# Altium PCB ESP32 WITH USB C PCB V111.PcbDoc (part 3 of 3)
Units mil, origin at the board's own origin, x right, y up, seen from the top; angles counter-clockwise.
Board outline 2735 x 1100 mil, 4 copper layers (L1, L2, L3, L4), stack 54.293 mil thick; 64 components, 73 nets, 299 pads, 176 vias.
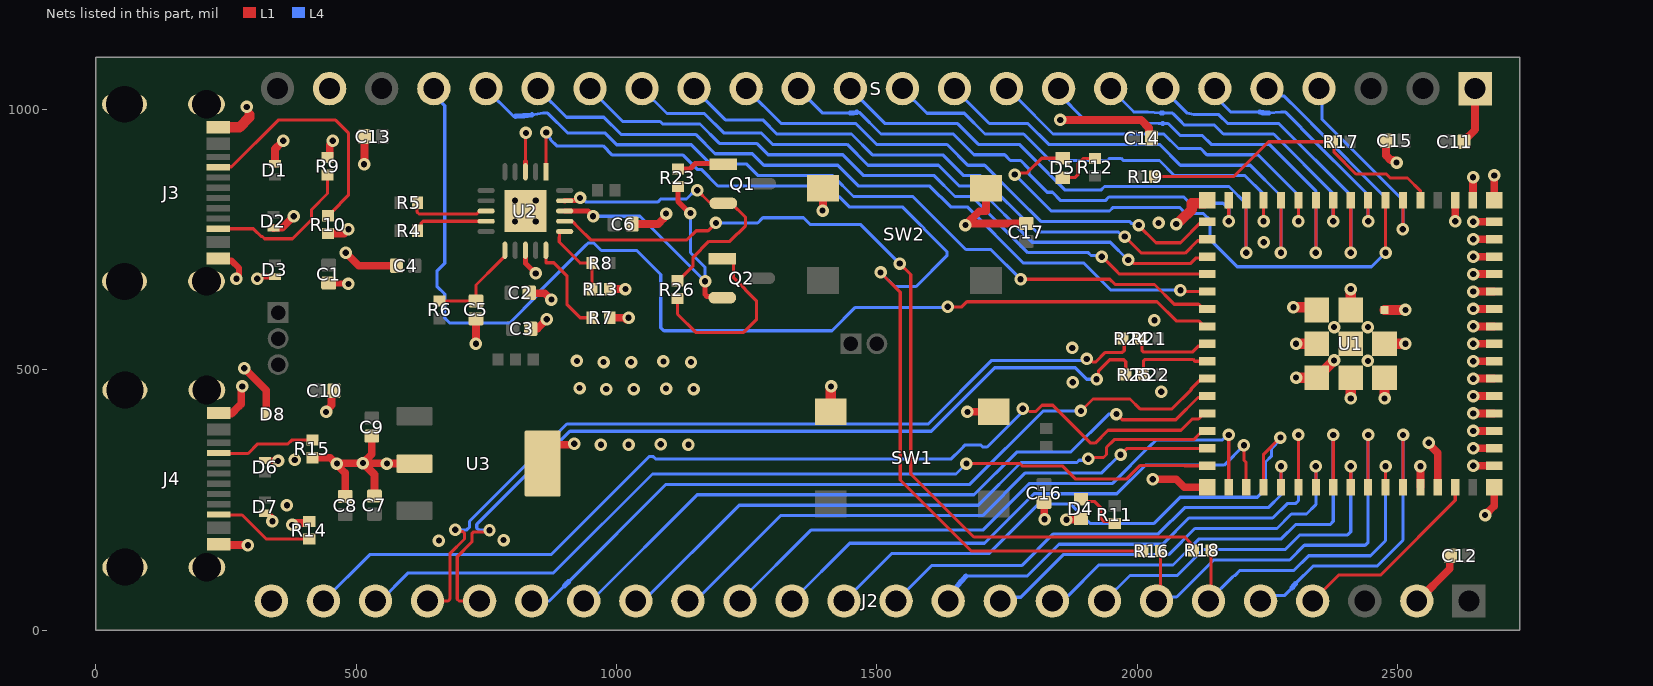
[diagram p4: the nets of this part, all layers, seen from the top]

## Via types
v1: diameter 24, hole 12, L1 to L4, tented both sides, 176 vias

## Nets (pads, with @x,y where several pads share a name; then routed paths per layer and width w, separated by ;. In a path a pad name is that pad's centre, name@x,y a point inside that pad or via, vN(x,y) a via of type N, cw(c..) or ccw(c..) an arc to the next point about the centre after c; other vN are vias at no path point) (continued)
CON_ESP_USB_N: J2.21 R24.1 | length 1669
  L1 w6.03: J2.21@637,56 676.45,56 679.99,59.53 679.99,146.99 708.06,175.06 708.06,186.03 704.53,189.56 693.44,189.56 v1(690,193) ; v1(1903,521) 1907.86,521 1913.8,515.06 1920.51,515.06 1938.84,533.39 1971.47,533.39 1975,536.93 R24.1@1975,563
  L4 w6.03: v1(690,193) 690.5,192.5 712.45,192.5 717.49,197.53 717.49,208.87 904.6,395.99 1598.6,395.99 1720.64,518.03 1900.03,518.03 v1(1903,521)
CON_ESP_USB_P: J2.20 R25.1 | length 1680.7
  L1 w6.03: J2.20@737,56 697.55,56 694.01,59.53 694.01,141.17 722.09,169.25 722.09,185.2 725.62,188.73 752.73,188.73 v1(756,192) ; v1(1922,482) 1925.44,485.44 1925.44,497.44 1947.36,519.36 1974.47,519.36 1978,515.83 R25.1@1978,491
  L4 w6.03: v1(756,192) 755.5,192.5 735.05,192.5 731.51,196.03 731.51,203.06 910.41,381.95 1604.41,381.95 1726.45,504 1881,504 1903,482 v1(1922,482)
DTR_FTDI: Q2.2 R23.2 U2.18 | length 589.1
  L1 w10.01: U2.18@900.41,805 945,805 v1(955,795) ; R23.2@1118,852.07 1118,823 v1@1140,801 ; v1(1170,670) 1170,645 1174.01,640.99 1200.76,640.99 Q2.2@1203.15,638.6
  L4 w6: v1(955,795) 1045,795 v1(1170,670) 1169.99,697.01 1142,725 v1(1142,801)
ESP_USB_N: R21.2 R24.2 U1.23 | length 159.1
  L1 w6.03: R21.2@2008.86,563 2008.86,537.53 2012.39,534 2106,534 2117.14,545.14 2129.59,545.14 U1.23@2134.45,550
ESP_USB_P: R22.2 R25.2 U1.24 | length 150.9
  L1 w6.03: R25.2@2011.86,491 2011.86,516.44 2015.39,519.97 2107.27,519.97 2110.71,516.54 U1.24@2134.45,516.54
FTDI_RESET: C5.2 R6.2 U2.11 | length 178.8
  L1 w6: R6.2@660,631.93 660.2,632.13 729.8,632.13 C5.2@730,632.32 730,655 730,663 772.63,705.63 U2.11@785.12,718.12
FTDI_USB_N: R4.1 U2.9 | length 144
  L1 w6.03: R4.1@618,767 624.62,773.62 624.62,781.78 628.16,785.32 725,785.32 U2.9@749.59,785.32
FTDI_USB_P: R5.1 U2.8 | length 154.9
  L1 w6.03: R5.1@618,821 617,820 617,802.88 620.53,799.34 725,799.34 731.67,799.34 737.32,805 U2.8@749.59,805
GND: C1.1 C2.1 C3.1 C4.1 C5.1 C6.1 C7.1 C8.1 C9.1 C10.1 C11.1 C12.1 C13.1 C14.1 C15.1 C16.1 C17.1 D1.1 D2.1 D3.2 D4.1 D6.1 D7.1 D8.2 J2.2 J2.24 J3.A1B12 J3.B1A12 J3.S1 J3.S2 J3.S3 J3.S4 J4.A1B12 J4.B1A12 J4.S1 J4.S2 J4.S3 J4.S4 R7.2 R9.1 R10.1 R13.1 R14.1 R15.1 S.1 S.23 SW1.3 SW1.4 SW2.3 SW2.4 U1.1 U1.2 U1.42 U1.43 U1.46 U1.47 U1.48 U1.49 U1.50 U1.51 U1.52 U1.53 U1.54 U1.55 U1.56 U1.57 U1.58 U1.59 U1.60 U1.61 U1.62 U1.63 U1.64 U1.65 U1.66 U1.67 U1.68 U1.69 U1.70 U1.71 U1.72 U1.73 U2.3 U2.13 U2.21 U3.2 U3.4 | length 4119.8
  L1 w6: 825,900 825,954 v1(826,955)
  L1 w10.01: U2.13@825,729.59 825.23,729.35 825.23,714.77 825.23,704.77 v1(845,685) ; U2.3@825,880.41 825,900
  L1 w12: J3.B1A12@235.12,713.94 239.06,710 260,710 275,695 v1@275,675 ; v1@315,675 319.2,679.2 D3.2@344,679.2 ; D7.1@325.3,224.7 329.63,224.7 336.7,217.63 336.7,211.3 v1(339,209) ; D6.1@325.3,325.3 349.7,325.3 v1(350,325) ; C1.1@447,666.68 447.84,665.84 484.16,665.84 v1(485,665)
  L1 w15: J4.B1A12@249.84,164.02 250.35,163.51 291.49,163.51 v1(292,163) ; J4.A1B12@249.84,415.98 260.67,415.98 274.68,430 279.28,434.59 279.28,466.28 v1(281,468) ; v1(285,503) 327.2,460.8 D8.2@327.2,415 ; D2.1@341,772.2 341.61,772.81 357.81,772.81 v1@375,790 ; D1.1@344,895.8 344,924 v1@355,935 ; v1(377,202) 379.44,202 383.16,205.73 406.87,205.73 R14.1@410,208.86 ; R15.1@418.18,331.07 450.06,331.07 461.13,320 v1(463,320) ; v1(442,419) 442,421.44 452.78,432.21 452.78,455.45 C10.1@457.32,460 ; R9.1@445,907.93 446.18,907.93 449.31,911.06 449.31,931.88 455,937.56 v1(455,940) ; R10.1@446,762.07 477.07,762.07 v1(485,770) ; C8.1@479,256.65 479,301.56 463,317.56 v1(463,320) ; v1(480,725) 505,700 545,700 C4.1@577.68,700 ; v1@515.68,895 C13.1@515.68,948 ; C9.1@530,372.68 530,338 v1(513,321) ; C7.1@535,257.32 535,299 v1(513,321) ; U3.2@611.97,320 v1(559,320) 558.5,320.5 513.5,320.5 v1(513,321) ; v1(730,550) C5.1@730,597.68 ; C2.1@832.32,648 836.39,648 837.42,646.97 862.06,646.97 874.02,635 v1(875,635) ; C3.1@835.32,579 848,579 v1(866,597) v1@866,594.56 ; U3.4@858.03,320 858.03,329.05 884.98,356 v1@915,356 ; R7.2@986.93,600 1015,600 v1@1019,596 ; R13.1@986.93,655 v1@1017.56,655 ; C6.1@1030,780 1080,780 v1@1090,790 ; v1@1395,805 1396.5,806.5 SW2.4@1396.5,848.58 ; v1@1678,419.58 SW1.3@1724.5,419.58 ; SW2.3@1709.5,848.58 1709.5,804.5 1696.5,804.5 1672.94,780.94 1674.16,779.72 1675.62,781.18 C17.1@1786.86,781.18 ; C16.1@1821,245.35 1821.5,244.85 1821.5,213.5 v1(1822,213) ; v1(1852,980) 2007.35,980 2022.78,964.58 2022.78,949.55 C14.1@2027.32,945 C14.1@2029.64,942.68 ; v1(1864,212) 1890,212 D4.1@1892,214 ; v1(2030,290) 2075,290 2090.59,274.41 U1.64@2134.45,274.41 U1.64@2133.74,273.7 ; C15.1@2477.68,940 2477.68,911.79 2486.46,903 v1@2491,903 ; J2.2@2538.34,56 2600.14,117.79 2600.14,141.46 C12.1@2601.68,143 ; U1.42@2543.9,274.41 v1(2543.9,314.57) ; v1(2560,360) 2560,357.56 2577.36,340.2 2577.36,314.57 U1.43@2577.36,274.41 ; v1(2610.83,785.43) U1.2@2610.83,825.59 ; C11.1@2627.32,938 2627.32,939.57 2649,961.25 S.1@2649,1040 ; U1.1@2644.29,825.59 2644.65,825.94 2644.65,869.65 v1(2645,870) ; v1(2645.47,315.75) U1.46@2685.63,315.75 ; v1(2645.47,349.21) U1.47@2685.63,349.21 ; v1(2645.47,382.68) U1.48@2685.63,382.68 ; v1(2645.47,416.14) U1.49@2685.63,416.14 ; v1(2645.47,449.61) U1.50@2685.63,449.61 ; v1(2645.47,483.07) U1.51@2685.63,483.07 ; v1(2645.47,516.54) U1.52@2685.63,516.54 ; v1(2645.47,550) U1.53@2685.63,550 ; v1(2645.47,583.46) U1.54@2685.63,583.46 ; v1(2645.47,616.93) U1.55@2685.63,616.93 ; v1(2645.47,650.39) U1.56@2685.63,650.39 ; v1(2645.47,683.86) U1.57@2685.63,683.86 ; v1(2645.47,717.32) U1.58@2685.63,717.32 ; v1(2645.47,750.79) U1.59@2685.63,750.79 ; v1(2645.47,784.25) U1.60@2685.63,784.25 ; v1(2668,221) 2685.63,238.63 U1.65@2685.63,274.41 ; U1.62@2685.63,825.59 v1@2685.63,873.21 ; v1(463,320) 463.5,320.5 512.5,320.5 v1(513,321)
  L1 w20: J3.A1B12@235.12,965.91 275.91,965.91 295,985 295,990 ; SW1.4@1411.5,419.58 1411.5,464.5 v1@1412,465 ; v1@2083.93,786.93 2104.84,807.84 2104.84,819.84 2128.7,819.84 U1.63@2134.45,825.59 ; v1(2300,620) 2340.04,620 U1.71@2345.08,614.96 ; v1(2305.04,485.04) U1.73@2345.08,485.04 v1(2378,518) ; v1(2305.04,550) U1.72@2345.08,550 ; v1(2410.04,445) U1.70@2410.04,485.04 ; U1.69@2410.04,614.96 v1(2410.04,655) ; v1(2475,445) U1.68@2475,485.04 ; U1.67@2475,550 v1(2515.04,550) ; U1.66@2475,614.96 v1(2515.04,614.96)
  other v1: 659,172 783,173 367,240 382,327 970,356 1023,356 1138,356 1085,357 919,358 1674,419 2046,458 980,463 1033,463 1148,463 1095,464 929,465 1412,468 1876,476 975,515 1028,515 1143,515 1090,516 924,517 2443,517 1875,542 2378,582 2443,582 2033,595 1023,600 1017,655 270,675 310,675 2243,745 1670,778 2075,780 2041,782 805,785 845,785 380,795 1095,800 1395.75,805.75 805,825 845,825 2685.81,873.39 515,895 2498,898 360,940 290,1005
GPIO0: R17.1 R19.1 U1.4 | length 606.2
  L1 w6: R19.1@2032.93,871 2185,871 2252,938 R17.1@2375.07,938 2378.2,934.87 2378.2,917.8 2420,876 2478.28,876 2485.78,868.5 2519.04,868.5 2544.27,843.27 2544.27,825.96 U1.4@2543.9,825.59
GPIO1: S.4 U1.5 | length 392.8
  L1 w6: v1(2510,770) 2510.43,770.43 U1.5@2510.43,825.59
  L4 w6: S.4@2349,1040 2355.23,1033.77 2355.23,980.63 2510.43,825.43 2510.43,770.43 v1(2510,770)
GPIO2: D5.1 S.5 U1.6 | length 1450.4
  L1 w6: v1(1765,875) 1767.68,877.68 1787.68,877.68 1790,880 1816.4,906.4 D5.1@1857,906.4 ; v1@2476.97,725.04 U1.6@2476.97,825.59
  L4 w6: v1(1765,875) 1835,805 1946.82,805 1953.82,812 2081.18,812 2093.18,800 2127.43,800 2140,787.43 2140,750 2192,698 2449.93,698 v1(2476.93,725) 2476.93,830.65 2335.23,972.35 2335.23,973.05 2295.28,1013 2294.58,1013 2281.52,1026.06 2277.56,1026.06 2263.61,1040 S.5@2249,1040
GPIO3: S.6 U1.7 | length 479.1
  L1 w6: v1@2443.07,785 v1(2443.5,785.43) U1.7@2443.5,825.59
  L4 w6: S.6@2149,1040 2149,1026 2177.07,997.93 2180,995 2235.44,995 ; 2252.62,993.14 2276.72,995 2285,995 2287.93,992.07 2315.23,964.77 2315.23,964.06 2443.5,835.79 v1(2443.5,785.43)
  L4 w10: 2235.44,995 ccw(c2249,1040) 2252.62,993.14
GPIO4: S.7 U1.8 | length 655.6
  L1 w6: v1(2410,725) v1(2410,725) U1.8@2410.04,825.59
  L4 w6: S.7@2049,1040 2094.02,994.98 2095.95,993.05 2107.79,990 2156.72,990 2173.72,973 2177.86,973 2272,973 2410,835 v1(2410,725)
GPIO5: S.8 U1.9 | length 603.5
  L1 w6: v1(2376.57,785.43) U1.9@2376.57,825.59
  L4 w6: S.8@1949,1040 1991.07,997.93 1994,995 2020.63,995 2045.48,993.13 ; 2049.24,993 2059.38,993.05 2067.66,993.05 2069.13,991.59 2080.72,980 2090.72,970 2148.43,970 2165.43,953 2262,953 2376.57,838.43 v1(2376.57,785.43)
  L4 w10: 2045.48,993.13 ccw(c2049,1040) 2049.24,993
GPIO6: S.9 U1.10 | length 798.5
  L1 w6: v1(2343.07,725) U1.10@2343.11,825.59
  L4 w6: S.9@1849,1040 1849,1030 1898.18,980.82 1900.96,978.04 1904.89,977.9 2040.78,973.02 2040.96,973 2048.72,973 ; 2049.28,973 2059.43,973 2062.36,970.07 2082.43,950 2125,950 2142,933 2253.72,933 2343.07,843.64 v1(2343.07,725)
  L4 w10: 2048.72,973 ccw(c2049,1040) 2049.28,973
GPIO7: S.10 U1.11 | length 740.6
  L1 w6: v1(2309.65,785.43) U1.11@2309.65,825.59
  L4 w6: S.10@1749,1040 1751.83,1027 1756.84,1022 1769.32,1022 1838.32,953 2051.15,953 2079.15,925 2121.72,925 2133.72,913 2232,913 2309.65,835.35 v1(2309.65,785.43)
GPIO8: S.11 U1.12 | length 921.9
  L1 w6: v1@2276.18,725.04 U1.12@2276.18,825.59
  L4 w6: S.11@1649,1040 1716,973 1790.04,973 1830.04,933 1969.72,933 2042.86,933 2082.86,893 2217,893 2276.14,833.86 v1(2276.14,725)
GPIO9: S.12 U1.13 | length 873
  L1 w6: v1(2242.72,785.43) U1.13@2242.72,825.59
  L4 w6: S.12@1549,1040 1596.14,992.86 1667.86,992.86 1707.72,953 1781.75,953 1832.75,902 1942.82,902 1946.82,906 1969.18,906 1973.18,902 2042.72,902 2071.72,873 2207,873 2242.72,837.28 v1(2242.72,785.43)
GPIO10: S.13 U1.14 | length 1052.2
  L1 w6: v1@2209.25,725.04 U1.14@2209.25,825.59
  L4 w6: S.13@1449,1040 1516.14,972.86 1655,972.86 1694.86,933 1773.47,933 1861.47,845 1930.25,845 1937.25,852 2176.35,852 2209.21,819.14 v1(2209.21,725)
GPIO11: S.14 U1.15 | length 998.6
  L1 w6: v1(2175.79,785.43) U1.15@2175.79,825.59
  L4 w6: S.14@1349,1040 1396,993 1449,993 ; 1460.84,994.52 1462.06,994.52 1466.2,994.52 1507.86,952.86 1646.72,952.86 1649.64,949.93 1686.57,913 1745.28,913 1756.28,902 1776.18,902 1792,886.18 1792,876.28 1827.28,841 1837.18,841 1853.18,825 1938.53,825 1945.53,832 2089.47,832 2101.47,820 2164.93,820 2175.79,809.14 v1(2175.79,785.43)
  L4 w10: 1449,993 ccw(c1449,1040) 1460.84,994.52
GPIO12: S.15 U1.16 | length 1025.4
  L1 w6: v1(2003,778) 2003,777 2036,744 2083,744 2103.7,764.7 2103.7,764.87 2112.49,773.66 2112.66,773.66 2120.38,781.38 2131.57,781.38 U1.16@2134.45,784.25
  L4 w6: S.15@1249,1040 1316,973 1459.43,973 1462.36,970.07 1499.57,932.86 1635,932.86 1637.93,929.93 1674.86,893 1706.85,893 1767.85,832 1767.96,832 1814.96,785 1985.18,785 1989.5,780.68 2000.32,780.68 v1(2003,778)
GPIO13: S.16 U1.17 | length 1127.4
  L1 w6: v1(1976,756) 1976.18,756 2008.18,724 2092,724 2115.91,747.91 2131.57,747.91 U1.17@2134.45,750.79
  L4 w6: S.16@1149,1040 1209,980 1280.72,980 1307.72,953 1451.15,953 1491.29,912.86 1626.72,912.86 1666.57,873 1698.57,873 1806.57,765 1963.21,765 1972.21,756 v1(1976,756)
GPIO14: S.17 U1.18 | length 1230.3
  L1 w6: v1(1983,711) 1986.79,711 1993.93,703.86 2101.86,703.86 2112.47,714.47 2131.59,714.47 U1.18@2134.45,717.32
  L4 w6: S.17@1049,1040 1096.77,992.23 1168.49,992.23 1205.72,955 1277.43,955 1299.43,933 1442.86,933 1483,892.86 1618.43,892.86 1658.29,853 1690.28,853 1798.28,745 1948.28,745 1982.28,711 v1(1983,711)
GPIO15: S.18 U1.19 | length 1333
  L1 w6: v1(1932,717) 1933,717 1957.89,692.11 ; 1957.79,692 1965.93,683.86 1981.14,683.86 1989,683.86 U1.19@2134.45,683.86
  L4 w6: S.18@949,1040 1012,977 1083.72,977 1088.49,972.23 1160.21,972.23 1197.43,935 1269.15,935 1291.15,913 1434.58,913 1474.72,872.86 1610.15,872.86 1650,833 1682,833 1790,725 1906.03,725 1911.35,719.68 1929.32,719.68 v1(1932,717)
GPIO16: S.19 U1.20 | length 1445.7
  L1 w6: v1@2083,650.39 U1.20@2134.45,650.39
  L4 w6: S.19@849,1040 904,985 975.72,985 1008.49,952.23 1151.92,952.23 1189.15,915 1260.86,915 1282.86,893 1425,893 1465.14,852.86 1601.86,852.86 1641.72,813 1673.72,813 1781.72,705 1897.75,705 1949.75,653 v1(2083,653)
GPIO17: S.20 U1.21 | length 1563.8
  L1 w6: v1(1776,674) 1947.5,674 1957.65,663.86 2033.14,663.86 2071,626 2117.84,626 2123.7,620.14 2123.7,619.8 2126.57,616.93 U1.21@2134.45,616.93
  L4 w6: S.20@749,1040 801.98,987.02 806.12,987.02 ; 837.43,989.69 858.62,992.94 860.14,993.05 867.66,993.05 905.72,955 977.43,955 1000.21,932.23 1143.64,932.23 1180.86,895 1250,895 1272,873 1415,873 1455.14,832.86 1569.14,832.86 1671,731 1719,731 v1(1776,674)
  L4 w10: 806.12,987.02 ccw(c806.12,997.02) 806.21,987.02 ccw(c802.02,1220.49) 837.43,989.69
GPIO18: S.21 U1.22 | length 2168.9
  L1 w6: v1(1636,621) 1662.94,621 1672.77,630.83 2037.89,630.83 2074.66,594.06 2117.84,594.06 2123.7,588.2 2123.7,586.34 2126.57,583.46 U1.22@2134.45,583.46
  L4 w6: S.21@649,1040 649,1028.14 670,1007.14 670,704.5 655,689.5 655,660.5 670,645.5 670,599.5 679.5,590 795,590 848,643 848,646.18 901.82,700 940,738.18 945.17,743.36 956.64,743.36 970.91,729.09 1039.09,729.09 1085,683.18 1085,580.86 1090.86,575 1413.79,575 1458.79,620 1635,620 v1(1636,621)
GPIO21: J2.19 U1.25 | length 1491.1
  L1 w6: v1(1892,421) 1915,444 1986,444 2005,425 2066.72,425 2103.7,461.99 2103.7,463.69 2120.2,480.2 2131.57,480.2 U1.25@2134.45,483.07
  L4 w6: J2.19@837,56 871,56 900.06,85.06 ; 907.94,92.94 1095,280 1678.29,280 1819.29,421 v1(1892,421)
  L4 w10: 900.06,85.06 cw(c937,56) 907.94,92.94
GPIO26: J2.18 U1.26 | length 1369.6
  L1 w6: v1(1960,415) 1971,404 2074,404 2116.73,446.73 2131.57,446.73 U1.26@2134.45,449.61
  L4 w6: J2.18@937,56 951,56 1155,260 1686.58,260 1768.58,342 1872,342 1945,415 v1(1960,415)
GPIO33: J2.17 U1.28 | length 1240.7
  L1 w6: v1(1906,329) 1908.59,331.59 1935.14,331.59 1941,337.45 1941,351 1955.94,365.94 2108.44,365.94 2119.5,377 2120.9,377 2123.7,379.8 2131.57,379.8 U1.28@2134.45,382.68
  L4 w6: J2.17@1037,56 1051.61,56 1235.61,240 1694.86,240 1776.86,322 1884.28,322 1888.61,326.32 1903.32,326.32 v1(1906,329)
GPIO34: J2.16 U1.29 | length 1119.5
  L1 w6: v1(1968,337) 1968.3,337 1980.51,349.21 U1.29@2134.45,349.21 U1.29@2134.06,349.61
  L4 w6: J2.16@1137,56 1151,56 1315,220 1703.15,220 1785.15,302 1932,302 1967,337 v1(1968,337)
GPIO35: J2.15 U1.31 | length 1171.5
  L1 w6: U1.31@2175.79,274.41 v1(2175.83,375)
  L4 w6: J2.15@1237,56 1373.14,192.14 1703.57,192.14 1793.43,282 1952.72,282 2023.72,353 2024,353 2036,365 2162.97,365 2172.97,375 v1(2175.83,375)
GPIO36: J2.14 U1.32 | length 1074.2
  L1 w6: v1(2205,355) 2205,326.36 2209.25,322.1 2209.25,314.57 U1.32@2209.25,274.41
  L4 w6: J2.14@1337,56 1448,167 1706.72,167 1801.72,262 1961,262 2016,317 2167,317 v1(2205,355)
GPIO37: J2.13 U1.33 | length 1148.9
  L1 w6: U1.33@2242.72,274.41 2242.72,337.72 v1(2275,370)
  L4 w6: J2.13@1437,56 1528,147 1715,147 1810,242 1872.18,242 1909.18,205 2032.43,205 2082.72,255.28 2230.58,255.28 2246.45,271.15 2246.45,323.02 2258.18,334.75 2258.18,349.39 2275,366.21 v1(2275,370)
GPIO38: J2.12 U1.34 | length 918.6
  L1 w6: U1.34@2276.18,274.41 v1(2276.18,314.57)
  L4 w6: J2.12@1537,56 1605,124 1778,124 1839,185 2040.72,185 2091,235.28 2251.83,235.28 2276.18,259.64 v1(2276.18,314.57)
GPIO39: J2.11 U1.35 | length 984.4
  L1 w6: U1.35@2309.65,274.41 v1@2309.65,374.96
  L4 w6: 1671.15,104 1788.72,104 1849.72,165 2049,165 2099.28,215.28 2260.11,215.28 2287.83,243 2303.83,243 2309.69,248.86 v1(2309.69,375)
  L4 w10: J2.11@1637,56 cw(c1806.13,-28.17) 1671.15,104
GPIO40: J2.10 U1.36 | length 796.4
  L1 w6: U1.36@2343.11,274.41 v1(2343.11,314.57)
  L4 w6: J2.10@1737,56 1744.23,63.23 1776.23,63.23 1858,145 2060.43,145 2110.72,195.28 2268.4,195.28 2296.11,223 2325,223 2343.11,241.11 v1(2343.11,314.57)
GPIO41: J2.9 U1.37 | length 869.6
  L1 w6: U1.37@2376.57,274.41 v1(2376.61,375)
  L4 w6: J2.9@1837,56 1847.33,66.33 1867.33,66.33 1926,125 2068.72,125 2119,175.28 2276.68,175.28 2304.4,203 2370.76,203 2376.61,208.86 v1(2376.61,375)
GPIO42: J2.8 U1.38 | length 693.9
  L1 w6: U1.38@2410.04,274.41 v1(2410.04,314.57)
  L4 w6: J2.8@1937,56 1986,105 2077,105 2126.8,154.8 2284.48,154.8 2312.68,183 2404.18,183 2410.04,188.86 v1(2410.04,314.57)
GPIO45: J2.5 U1.41 | length 625.1
  L1 w6: U1.41@2510.43,274.41 v1@2510.43,374.96
  L4 w6: J2.5@2237,56 2247.33,66.33 2282.33,66.33 2297.55,81.55 ; 2303.77,89.23 2337.53,123 2460.61,123 2510.47,172.86 v1(2510.47,375)
  L4 w10: 2297.55,81.55 cw(c2337,56) 2303.77,89.23
GPIO46: J2.4 U1.44 | length 379.1
  L1 w6: J2.4@2337,56 2387,106 2467.65,106 2610.83,249.17 U1.44@2610.83,274.41
GPIO47: J2.23 U1.27 | length 1906.5
  L1 w6: 1793.58,420 1805.18,420 1817.18,432 1838,432 1910.86,359.14 1919.14,359.14 1944,384 2084,384 2105.55,405.55 2117.84,405.55 2123.7,411.41 2123.7,413.27 2126.57,416.14 U1.27@2134.45,416.14
  L4 w6: J2.23@437,56 526,145 874,145 1062.27,333.27 1070.55,333.27 1074.82,329 1642.82,329 1660.82,347 1669.67,355.86 1699.14,355.86 1703.36,351.64 1711.64,351.64 1780,420 v1(1780,425)
GPIO48: J2.22 U1.30 | length 1730.1
  L1 w6: v1(1672,320) 1775,320 1780,315 1857.05,315 1882.05,290 1979.11,290 2005.11,316 2086,316 ; 2086.03,316.03 2091,316.03 2091.28,315.75 U1.30@2134.45,315.75
  L4 w6: J2.22@537,56 546,56 600,110 879,110 1069,300 1652,300 v1(1672,320)
NetD4_2: D4.2 R11.1 | length 95.6
  L1 w6: D4.2@1892.6,252 1897.3,247.3 1917.7,247.3 1930.19,234.81 1930.19,214.81 1936.67,208.33 1953.67,208.33 R11.1@1957,205
NetD5_2: D5.2 R12.1 | length 89.5
  L1 w6: D5.2@1857,869 1879.95,869 1886.53,875.58 1886.53,896.39 1896.07,905.93 R12.1@1919,905.93
NetJ3_A5: J3.A5 R10.2 | length 473.5
  L1 w6: J3.A5@235.12,889.13 236.02,890.04 260.44,890.04 350,979.6 460.4,979.6 485,955 485,834.93 452.81,802.74 452.81,801.56 447.18,795.93 R10.2@446,795.93
NetJ3_B5: J3.B5 R9.2 | length 300.8
  L1 w6: J3.B5@235.12,771.02 302.27,771.02 305,768.29 317.29,756 320.12,756 324.41,751.71 377.71,751.71 414.09,788.09 414.09,807.68 445,838.58 R9.2@445,874.07
NetJ4_A5: J4.A5 R15.2 | length 177.8
  L1 w6: J4.A5@249.84,339.21 292.54,339.21 311,357.68 369.03,357.68 376.28,364.93 R15.2@417,364.93
NetJ4_B5: J4.B5 R14.2 | length 179.3
  L1 w6: J4.B5@249.84,221.1 280.9,221.1 300,202 327,175 R14.2@410,175
NetQ1_1: Q1.1 R23.1 | length 91.7
  L1 w10.01: R23.1@1118,885.93 1140.93,885.93 1151,896 1203.8,896 Q1.1@1205,894.8
NetQ2_1: Q2.1 R26.1 | length 359.7
  L1 w6: R26.1@1117,637.14 1117,607 1152,572 1244,572 1269,597 1269,632 1247,654 1247,654.41 1224.87,676.54 1224.87,707.14 1218.61,713.4 Q2.1@1203.15,713.4
NetR7_1: R7.1 U2.15 | length 188.6
  L1 w6: U2.15@864.37,729.59 864.37,705.63 879.37,705.63 885,700 905,680 905,665 905,625 930,600 R7.1@953.07,600
RTS_FTDI: Q1.2 R26.2 U2.19 | length 584.5
  L1 w6: R26.2@1117,671 1118.18,671 1147.01,699.83 1147.01,716.46 1177.28,746.73 1217.73,746.73 1248,777 1248,792.45 1220.45,820 Q1.2@1205,820 1202.61,822.39 1177.61,822.39 v1(1155,845)
  L1 w10.01: U2.19@900.41,824.68 900.65,824.92 921.13,824.92 926.21,830 v1(930,830)
  L4 w6: v1(930,830) 933.79,830 940,823.79 941.78,822 1078.81,822 1084.81,828 1134.22,828 1151.21,845 v1(1155,845)
RXD_FTDI: R16.2 U2.1 | length 2040.7
  L1 w6: U2.1@864.37,880.41 864.37,944.37 v1@865,945 ; v1(1507,687) 1545,649 1545,645.72 1545,288.28 1681.28,152 R16.2@2011.07,152
  L4 w6: v1(865,956) 865,952.21 873.18,944.03 873.18,942.07 885.25,930 974.15,930 991.92,912.23 1127.77,912.23 1155,885 1162.58,885 1194.58,853 1406.72,853 1446.86,812.86 1548.86,812.86 1634.44,727.27 1634.44,718.99 1575.46,660 1534,660 v1(1507,687)
TXD_FTDI: R18.2 U2.17 | length 1721.1
  L1 w6: U2.17@900.41,785.32 914.79,785.32 927.94,772.16 927.94,772.06 950.41,749.59 1135.41,749.59 1152.83,767 1176,767 v1(1191,782) ; v1(1544,704) 1565,683 1565,654 1565,300 1686.19,178.81 2091.19,178.81 2105,165
  L4 w6: v1(1191,782) 1270.99,782 1280.99,792 1359.18,792 1372.43,778.75 1469.25,778.75 v1(1544,704)
U0RXD: J2.6 R18.1 U1.40 | length 669.6
  L1 w6: J2.6@2137,56 2141.93,60.93 R18.1@2141.93,153 ; U1.40@2476.97,274.41 v1(2476.97,314.57)
  L4 w6: J2.6@2137,56 2183.24,102.24 2184.91,103.91 2187.15,104.66 2197.3,114.8 2301.05,114.8 2329.25,143 2448,143 2476.97,171.97 v1(2476.97,314.57)
U0TXD: J2.7 R16.1 U1.39 | length 859.3
  L1 w6: J2.7@2037,56 2044.93,63.93 R16.1@2044.93,152 ; U1.39@2443.5,274.41 v1(2443.54,375)
  L4 w6: J2.7@2037,56 2044.73,63.73 2075.73,63.73 2146.8,134.8 2292.76,134.8 2320.96,163 2437.69,163 2443.54,168.86 v1(2443.54,375)
VBUS_SENSE: R8.1 R13.2 U2.16 | length 160.1
  L1 w6: U2.16@900.41,765.63 890.62,765.63 890.39,765.4 890.39,755.61 890,755.22 890,745.35 929.72,705.63 930.35,705 R8.1@953.07,705 R13.2@953.07,655
pads on no net: J3.A8 J3.B8 J4.A8 J4.B8 S.24 U2.2 U2.4 U2.5 U2.6 U2.7 U2.14

## Polygon pours and split planes (outlines as drawn)
+5V_VBUS2 on L1 "+5V_VBUS2_L01_P032" (solid, pour order 32): 324,503.11 345,466.63 345,400 408,400 419,411 419,433 424,433 435,444 435,525 430,530 324,530
GND on L1 "GND_L01_P036" (solid, pour order 36): 1176,178 1176,223 1176,549 921,549 894,522 894,439 866,411 736,411 736,374 735,375 462,375 426,341.18 426,308 473,261 742,261 826,177 1175,177
GND on L1 "GND_L01_P035" (solid, pour order 35): 2275,431 2550,431 2552.19,433.19 2552.19,671.16 2275.16,671.16 2275,671
+5V_VBUS1 on L1 "+5V_VBUS1_L01_P030" (solid, pour order 30): 321,589.56 321,638 359,638 374,653 374,737 423,737 423,588.46
+5V on L1 "+5V_L01_P034" (solid, pour order 34): 327,580.98 326,540 466.96,537.04 515,489 515,390 653,390 653,433 600,433 545,485 545,509 474,580 372,580
+3V3_REG on L1 "+3V3_REG_L01_P033" (solid, pour order 33): 648,259 648,248 648,206 603,161 440,161 440,235 561,235 577,251 648,251 648,235
+3V3_FTDI on L1 "+3V3_FTDI_L01_P031" (solid, pour order 31): 598,720 598.89,665.11 598,648 591,641 591,619 629,581 683,581 683,607 679,611 622,611 622,634 643,655 708,655 708,689 677,720 644,720
+3V3_FTDI on L1 "+3V3_FTDI_L01_P029" (solid, pour order 29): 983,858 983,764 1013,764 1013,797 1042,826 1083,826 1083,888 1013,888
+3V3 on L1 "+3V3_L01_P028" (solid, pour order 28): 2500,969 2500,947 2500,924 2605,924 2605,984 2521,984 2500,963 2500,955
GND on L2 "GND_L02_P039" (solid, remove dead copper, pour order 39): 2706,12.99 2706,1092.01 18,1086.5 18,21.51
+3V3_REG on L2 "+3V3_REG_L02_P037" (solid, pour order 37): 439,248 439,161 589,161 589,247 588,248
+3V3 on L2 "+3V3_L02_P038" (solid, remove dead copper, pour order 38): 2694,17.5 2694,1086.25 2693.75,1086.5 705,1086.5 705,653.5 815,543.5 815,469.5 860,469.5 880,489.5 880,560.5 763,677.5 763,864.5 1004,864.5 1031,891.5 1432,891.5 1432,630.5 1480,582.5 1480,518.5 1761,518.5 1808,471.5 1808,391.5 1851,348.5 1900,348.5 1900,374.5 1855,419.5 1855,495.5 1761,589.5 1532,589.5 1532,624.5 1493,663.5 1494,664.5 1494,887.5 1856,887.5 1892,851.5 2394,851.5 2518,975.5 2544,949.5 2574,949.5 2574,856.5 2544,826.5 2544,613.5 2591,566.5 2591,17.5
GND on L3 (split plane): 2734.95,0.05 0.05,0.05 0.05,1099.95 2734.95,1099.95

## Silkscreen, mask and mechanical layers (free items; w line width, h text height)
Top Overlay:
  lines w6: 736,101 736,126 ; 750,970 750,995 ; 1236,101 1236,126 ; 1250,970 1250,995 ; 1736,101 1736,126 ; 1750,970 1750,995 ; 2236,101 2236,126 ; 2250,970 2250,995
  text "J1" at 2286,1009 h40 r270
  text "BOOT/USB" at 1401,921 h40
  text "USR" at 1876,771 h40
  text "UART" at 36,586 h40
  text "USB1" at 401,581 h40
  text "+5V" at 181,531 h40
  text "REG" at 1286,531 h40
  text "3V3" at 1551,521 h40
  text "ESP" at 46,501 h40
  text "USB2" at 401,501 h40
  text "J2" at 2281,169 h40 r270
  text "RESET" at 1471,136 h40
  text "PWR" at 1831,106 h40
Bottom Overlay:
  text "GND" at 469,969 h40 r90
  text "5V" at 569,969 h40 r90
  text "IO18" at 669,969 h40 r90
  text "IO16" at 869,969 h40 r90
  text "IO15" at 969,969 h40 r90
  text "IO14" at 1069,969 h40 r90
  text "IO13" at 1169,969 h40 r90
  text "IO11" at 1369,969 h40 r90
  text "IO10" at 1469,969 h40 r90
  text "IO9" at 1569,969 h40 r90
  text "IO8" at 1669,969 h40 r90
  text "IO6" at 1869,969 h40 r90
  text "I05" at 1969,969 h40 r90
  text "IO4" at 2069,969 h40 r90
  text "IO3" at 2169,969 h40 r90
  text "IO1" at 2369,969 h40 r90
  text "IO0" at 2469,969 h40 r90
  text "3V3" at 2569,969 h40 r90
  text "GND" at 2669,969 h40 r90
  text "NC" at 371.23,967.8 h40 r90
  text "IO12" at 1271.23,967.8 h40 r90
  text "IO7" at 1771.23,967.8 h40 r90
  text "IO2" at 2271.23,967.8 h40 r90
  text "IO17" at 769,964 h40 r90
  text "<--PIN 1-->" at 2669,769 h40 r90
  text "DESIGNED WITH FEDEVEL" at 1868,697 h40
  text "www.fedevel.com" at 2624,671 h40
  text "C(2024) ZEON" at 1679,441 h40
  text "ESPV1_I1_P" at 1634,342.66 h40
  text "Zeon Charging" at 966,318.33 h40
  text "GND" at 359,269 h40 r90
  text "IO47" at 459,269 h40 r90
  text "IO48" at 559,269 h40 r90
  text "USB-" at 659,269 h40 r90
  text "USB+" at 759,269 h40 r90
  text "IO21" at 859,269 h40 r90
  text "IO26" at 959,269 h40 r90
  text "IO33" at 1059,269 h40 r90
  text "IO34" at 1159,269 h40 r90
  text "IO35" at 1259,269 h40 r90
  text "IO36" at 1359,269 h40 r90
  text "IO37" at 1459,269 h40 r90
  text "IO38" at 1559,269 h40 r90
  text "IO39" at 1659,269 h40 r90
  text "IO40" at 1759,269 h40 r90
  text "IO41" at 1859,269 h40 r90
  text "IO42" at 1959,269 h40 r90
  text "TXD" at 2059,269 h40 r90
  text "RXD" at 2159,269 h40 r90
  text "IO45" at 2259,269 h40 r90
  text "IO46" at 2359,269 h40 r90
  text "EN" at 2459,269 h40 r90
  text "3V3" at 2669,269 h40 r90
  text "GND" at 2559,264 h40 r90
Top Solder:
  region: 585 vertices and 1 holes, not listed, extent 1201.87,120.01 1343.52,255.55
Board Shape:
  lines w20: 0,0 2725,0 2730,0 ccw(c2730,5) 2735,5 2735,1100 -5,1100 -5,10 ccw(c0,10) 0,5

## Text inside footprints (layer, text, board x,y; h text height)
J5: Top Overlay "1" at 278,593 h40
ss: Top Overlay "1" at 1467,478 h40 r90